# Altium PCB FlightLogger.PcbDoc
Units mm, origin at the board's own origin, x right, y up, seen from the top; angles counter-clockwise.
Board outline 35.6 x 15.7 mm, 2 copper layers (Top Layer, Bottom Layer); 79 components, 46 nets, 225 pads, 47 vias.
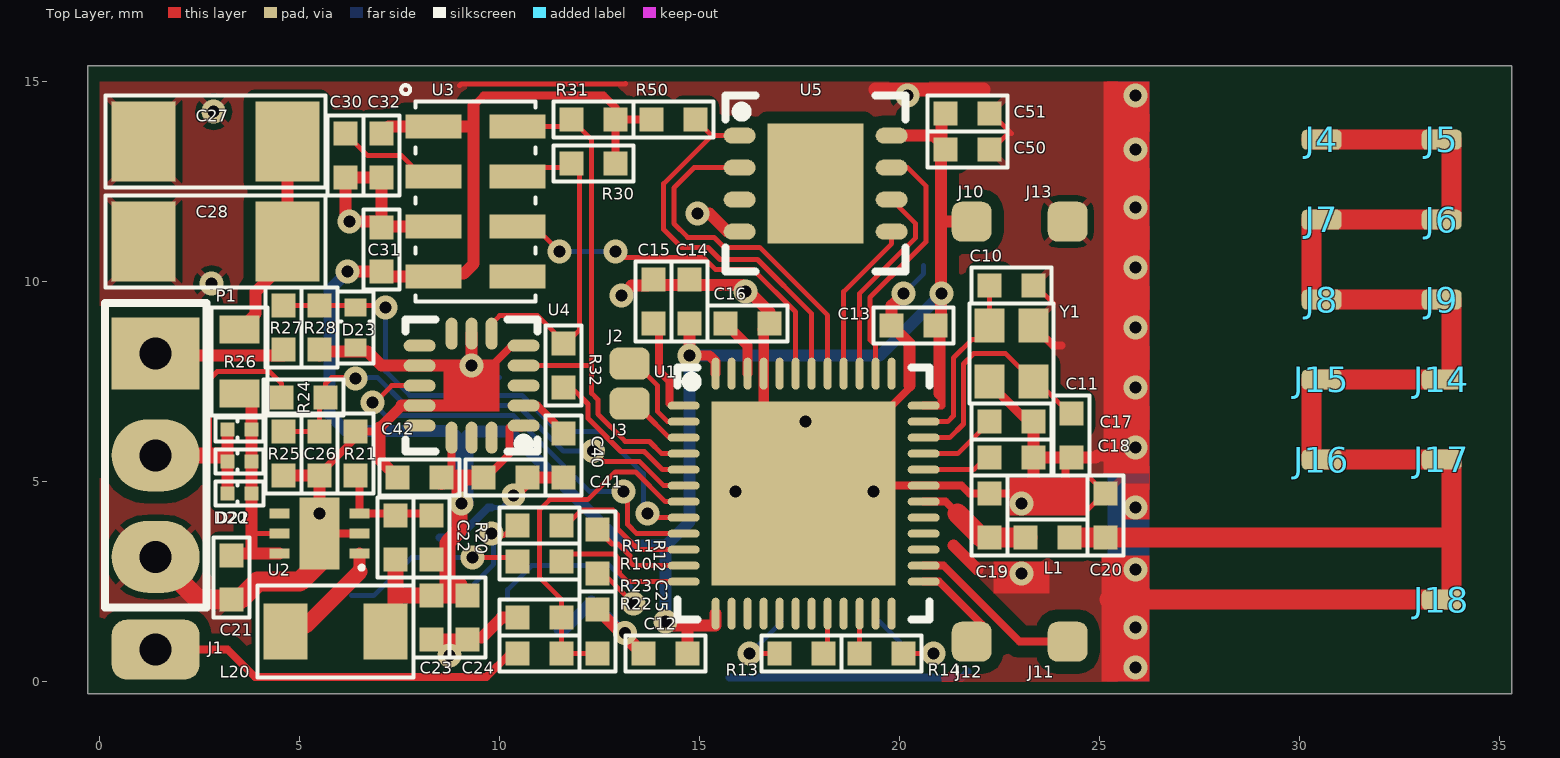
[diagram p0: Top Layer view]
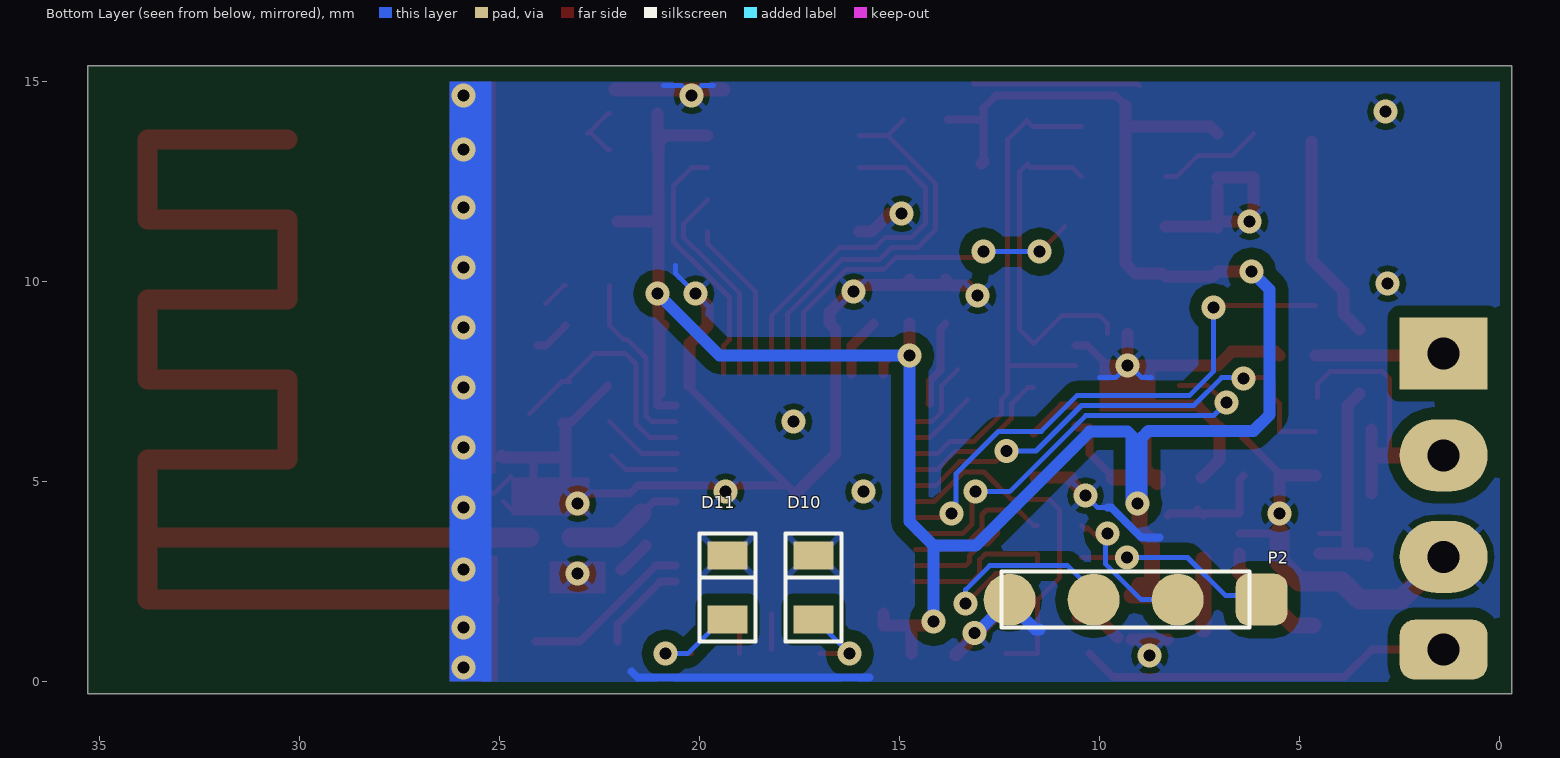
[diagram p1: Bottom Layer view, seen from below]

## Layer stack, top to bottom
Top Solder: solder mask 0.0102, Solder Resist, Dk 3.5
Top Layer: signal copper 0.0356
Dielectric 1: dielectric 0.32, FR-4, Dk 4.8
Bottom Layer: signal copper 0.0356
Bottom Solder: solder mask 0.0102, Solder Resist, Dk 3.5

## Board outline
-0.3,-0.3 35.3,-0.3 35.3,15.4 29.1,15.4 -0.3,15.4

## Design rules (kind name [scope] priority, off if disabled: settings)
Clearance Clearance_pour [InPolygon] p1: gap=0.3 ignorepadtopadclearanceinfootprint=FALSE except(0: Arc-Hole Track-Hole SMDPad-Hole THPad-Hole Via-Hole Fill-Hole Poly-Hole Region-Hole Text-Hole)
Clearance [All] p2: gap=0.127 ignorepadtopadclearanceinfootprint=FALSE except(0: Arc-Hole Track-Hole SMDPad-Hole THPad-Hole Via-Hole Fill-Hole Poly-Hole Region-Hole Text-Hole)
ComponentClearance [All] p1 off: gap=0.1 collisioncheckmode=3 verticalgap=0.1 showdistances=FALSE
FabricationTestpoint [All] p1: side=3 testpointundercomponent=TRUE minsize=1 maxsize=2 preferedsize=1 minholesize=0 maxholesize=1.016 preferedholesize=0 testpointgrid=0.025 allowsidetop=TRUE allowsidebottom=TRUE usegrid=TRUE gridtolerance=0
HoleSize [All] p1: absolutevalues=TRUE maxlimit=2.54 minlimit=0.3 maxpercent=80.000 minpercent=20.000
HoleToHoleClearance [All] p1: gap=0.4 allowstackedmicrovias=TRUE
MinimumAnnularRing [All] p1: minimumring=0.09
MinimumSolderMaskSliver [All] p1: minsoldermaskwidth=0.127
PlaneClearance [All] p1: clearance=0.308
PlaneConnect [All] p1: planeconnectstyle=Relief reliefexpansion=0.2 reliefentries=4 reliefconductorwidth=0.2 reliefairgap=0.2
PolygonConnect PolygonConnect_1 [All vs IsNamedPolygon('Top_GND')] p1: connectstyle=Relief reliefconductorwidth=0.15 reliefentries=4 polygonreliefangle="45 Angle" airgapwidth=0.15
PolygonConnect PolygonConnect_3 [All vs IsNamedPolygon('Bottom_GND')] p2 off: connectstyle=Relief reliefconductorwidth=0.15 reliefentries=4 polygonreliefangle="45 Angle" airgapwidth=0.15
PolygonConnect [All] p3 off: connectstyle=Relief reliefconductorwidth=0.2 reliefentries=4 polygonreliefangle="45 Angle" airgapwidth=0.3
RoomDefinition FlightLogger [InComponentClass('FlightLogger')] p1: confinementstyle=ConfineIn formatcopy=TRUE lockcomponents=FALSE outline 0,0 35,0 35,15 0,15
RoutingCorners [All] p1: cornerstyle=45-Degree minsetback=1.25 maxsetback=1.25
RoutingVias [All] p1: holewidth=0.3 width=0.6 viastyle="Through Hole" minholewidth=0.3 minwidth=0.6 maxholewidth=1 maxwidth=1.5
SilkToSilkClearance [All] p1 off: silktosilkclearance=0.01
SilkToSolderMaskClearance [IsPad] p1: minsilkscreentomaskgap=0 clearancetoexposedcopper=TRUE
SolderMaskExpansion SolderMaskExpansion_vias [IsVia] p1: expansion=-0.6
SolderMaskExpansion [All] p2: expansion=0.01
Width [All] p1: maxlimit=2 minlimit=0.127 preferedwidth=0.127
20 further rules are at their usual default settings.

## Classes and differential pairs
component class FlightLogger: C10 C11 C12 C13 C14 C15 C16 C17 C18 C19 C20 C21 C22 C23 C24 C25 C26 C27 C28 C30 C31 C32 C40 C41 C42 C50 C51 D10 D11 D20 D21 D22 D23 J1 J2 J3 J4 J10 J11 J12 J13 L1 L20 P1 P2 R10 R11 R12 R13 R14 R20 R21 R22 R23 R24 R25 R26 R27 R28 R30 R31 R32 R50 U1 U2 U3 U4 U5 Y1

## Components (designator, comment, footprint, x,y, rotation, side; value= is the part's Value field where it differs from the comment)
C10 "12p" 0402_cap 22.8,9.9 r180 top
C11 "12p" 0402_cap 24.3,6.15 r90 top
C12 "100n" 0402_cap 14.15,0.7 r180 top
C13 "100n" 0402_cap 20.35,8.9 r180 top
C14 "4u7" 0402_cap 14.75,9.5 r90 top
C15 "100n" 0402_cap 13.85,9.5 r90 top
C16 "1u" 0402_cap 16.2,8.95 r0 top
C17 "100p" 0402_cap 22.8,6.5 r180 top
C18 "N/C" 0402_cap 22.8,5.6 r180 top
C19 "0.8p" 0402_cap 22.25,4.15 r270 top
C20 "1.2p" 0402_cap 25.15,4.15 r270 top
C21 "100n" 0402_cap 3.3,2.6 r270 top
C22 "330p" 0402_cap 7.4,3.6 r90 top
C23 "10u" 0402_cap 8.3,1.6 r270 top
C24 "10u" 0402_cap 9.2,1.6 r270 top
C25 "100n" 0402_cap 12.45,1.25 r90 top
C26 "10n" 0402_cap 5.5,5.7 r270 top
C27 "100u" 1206_cap 2.9,13.5 r180 top
C28 "100u" 1206_cap 2.9,11 r180 top
C30 "100n" 0402_cap 6.15,13.15 r90 top
C31 "100n" 0402_cap 7.05,10.8 r270 top
C32 "4u7" 0402_cap 7.05,13.15 r90 top
C40 "100n" 0402_cap 11.6,5.65 r90 top
C41 "100n" 0402_cap 10.15,5.1 r180 top
C42 "4u7" 0402_cap 8,5.1 r0 top
C50 "10u" 0402_cap 21.7,13.3 r180 top
C51 "100n" 0402_cap 21.7,14.2 r180 top
D10 "HCL-1906BR1" 0603_led_green 17.15,2.35 r90 bottom
D11 "HCL-1906BR1" 0603_led_green 19.3,2.35 r90 bottom
D20 "PMEG2002AESF" SOD962_2 3.5,4.7 r180 top
D21 "PMEG2002AESF" SOD962_2 3.5,5.5 r180 top
D22 "PMEG2002AESF" SOD962_2 3.5,6.3 r180 top
D23 "D Zener" VMN2M 6.4,8.85 r90 top
J1 "PAD" PAD_0.6x1mm#1 1.4,0.8 r0 top
J2 "PAD" PAD_0.6x1mm#2 13.25,7.95 r180 top
J3 "PAD" PAD_0.6x1mm#2 13.25,6.95 r180 top
J4 "PAD" PAD_0.6x1mm#3 30.55,13.55 r0 top
J5 "PAD" PAD_0.6x1mm#3 33.55,13.55 r0 top (schematic designator J4)
J6 "PAD" PAD_0.6x1mm#3 33.55,11.55 r0 top (schematic designator J4)
J7 "PAD" PAD_0.6x1mm#3 30.55,11.55 r0 top (schematic designator J4)
J8 "PAD" PAD_0.6x1mm#3 30.55,9.55 r0 top (schematic designator J4)
J9 "PAD" PAD_0.6x1mm#3 33.55,9.55 r0 top (schematic designator J4)
J10 "PAD" PAD_0.6x1mm#4 21.8,11.5 r90 top
J11 "PAD" PAD_0.6x1mm#5 23.5,1 r90 top
J12 "PAD" PAD_0.6x1mm#4 21.8,1 r270 top
J13 "PAD" PAD_0.6x1mm#5 23.5,11.5 r90 top
J14 "PAD" PAD_0.6x1mm#3 33.55,7.55 r0 top (schematic designator J4)
J15 "PAD" PAD_0.6x1mm#3 30.55,7.55 r0 top (schematic designator J4)
J16 "PAD" PAD_0.6x1mm#3 30.55,5.55 r0 top (schematic designator J4)
J17 "PAD" PAD_0.6x1mm#3 33.55,5.55 r0 top (schematic designator J4)
J18 "PAD" PAD_0.6x1mm#3 33.55,2.05 r0 top (schematic designator J4)
L1 "3.9nH" 0402_res 23.7,3.6 r0 top
L20 "CVH252009-2R2M" 1008_Inductor 5.9,1.25 r0 top
P1 "Conn3" HDR1X3 1.4,8.2 r270 top
P2 "Conn4" conn_4pin_1row_1mm 9.35,2.05 r0 bottom
R10 "120" 0402_res 11,3 r0 top
R11 "120" 0402_res 11,3.9 r0 top
R12 "120" 0402_res 12.45,3.25 r90 top
R13 "1k" 0402_res 17.55,0.7 r180 top
R14 "1k" 0402_res 19.55,0.7 r0 top
R20 "100k" 0402_res 8.3,3.6 r90 top
R21 "33k" 0402_res 6.4,5.7 r270 top
R22 "47k" 0402_res 11,0.7 r0 top
R23 "6k8" 0402_res 11,1.6 r180 top
R24 "47k" 0402_res 5.1,7.1 r0 top
R25 "22k" 0402_res 4.6,5.7 r270 top
R26 "2R2" 0603_res 3.5,8 r90 top
R27 "4k7" 0402_res 4.6,8.85 r90 top
R28 "100k" 0402_res 5.5,8.85 r270 top
R30 "4k7" 0402_res 12.35,12.95 r180 top
R31 "4k7" 0402_res 12.35,14.05 r180 top
R32 "0" 0402_res 11.6,7.9 r270 top
R50 "47k" 0402_res 14.35,14.05 r0 top
U1 "nRF52832" QFN48 17.6,4.7 r0 top
U2 "XC9264" USP-6C 5.5,3.7 r180 top
U3 "MPL3115A2" MPL3115A2 9.4,12 r0 top
U4 "MMA8452Q" QFN16SP 9.3,7.4 r180 top
U5 "S25FL064L" USON8 17.9,12.45 r90 top
Y1 "32MHz" Cristal_2_1.6_4pin 22.8,8.2 r270 top

## Footprints (in the part's own frame and the unit in brackets; to place one, negate y for a bottom-side part, rotate by r counter-clockwise, add the part's x,y. Pads: shape width x height; smd on the part's side, far side on the other; paste and mask are expansions set on the pad)
0402_cap [mm]
  rect 0.6x0.6 smd: 1(-0.55,0) 2(0.55,0)
  silkscreen extent -1,-0.45 1,0.45, body extent -0.5,-0.25 0.5,0.25, height 0.5
0402_res [mm]
  rect 0.6x0.6 smd: 1(-0.55,0) 2(0.55,0)
  silkscreen extent -1,-0.45 1,0.45, body extent -0.5,-0.25 0.5,0.25, height 0.25
0603_led_green [mm]
  rect 0.7x1 smd: 1(-0.8,0) 2(0.8,0)
  silkscreen extent -1.35,-0.7 1.35,0.7, body extent -0.8,-0.4 0.8,0.4, height 0.8
0603_res [mm]
  rect 0.7x1 smd: 1(-0.8,0) 2(0.8,0)
  silkscreen extent -1.35,-0.7 1.35,0.7, body extent -0.8,-0.4 0.8,0.4, height 0.45
1008_Inductor [mm]
  rect 1.1x1.4 smd: 1(-1.25,0) 2(1.25,0)
  silkscreen extent -1.95,-1.15 1.95,1.15, body extent -1.25,-1 1.25,1, height 1.6
1206_cap [mm]
  rect 1.6x2 smd: 1(1.8,0) 2(-1.8,0)
  silkscreen extent -2.75,-1.15 2.75,1.15, body extent -1.6,-0.85 1.6,0.85, height 1.6
conn_4pin_1row_1mm [mm]
  rrect50% 1.3x1.3 smd: 1(-3.4,0)
  round 1.3 smd: 2(-1.3,0) 3(0.8,0)
  round 1.3 smd mask+0.01: 4(2.9,0)
  silkscreen extent -3.1,-0.7 3.1,0.7
Cristal_2_1.6_4pin [mm]
  rect 0.85x0.75 smd: 1(-0.7,-0.55) 2(-0.7,0.55) 2(0.7,-0.55) 3(0.7,0.55)
  silkscreen extent -1.25,-1.05 1.25,1.05, body extent -1,-0.8 1,0.8, height 0.5
HDR1X3 [mm] "Connector; Header; 3 Position"
  rect 1.8x2.2 hole 0.8: 1(0,0)
  oval 1.8x2.2 hole 0.8: 2(2.54,0) 3(5.08,0)
  silkscreen extent -1.27,-1.27 6.35,1.27
MPL3115A2 [mm]
  rect 1.4x0.6 smd: 1(-1.05,1.875) 2(-1.05,0.625) 3(-1.05,-0.625) 4(-1.05,-1.875) 5(1.05,-1.875) 6(1.05,-0.625) 7(1.05,0.625) 8(1.05,1.875)
  silkscreen extent -1.86,-2.5 1.5,2.91, body extent -1.5,-2.5 1.5,2.5, height 1.1
PAD_0.6x1mm#1 [mm] "Pad 0.6mmx1mm"
  rrect50% 2.2x1.5 smd: 1(0,0)
PAD_0.6x1mm#2 [mm] "Pad 0.6mmx1mm"
  rrect50% 1x0.8 smd: 1(0,0)
PAD_0.6x1mm#3 [mm] "Pad 0.6mmx1mm"
  rrect50% 1x0.5 smd paste+0 mask-10: 1(0,0)
PAD_0.6x1mm#4 [mm] "Pad 0.6mmx1mm"
  rrect50% 1x1 smd: 1(0,0)
PAD_0.6x1mm#5 [mm] "Pad 0.6mmx1mm"
  rrect50% 1x1 smd: 1(0,-0.7)
QFN16SP [mm] "USON, 8-Leads, Body 3x3mm, Pitch 0.5mm, IPC Low Density"
  oval 0.8x0.3 smd mask+0.03: 1(-1.3,1) 2(-1.3,0.5) 3(-1.3,0) 4(-1.3,-0.5) 5(-1.3,-1) 9(1.3,-1) 10(1.3,-0.5) 11(1.3,0) 12(1.3,0.5) 13(1.3,1)
  oval 0.3x0.8 smd mask+0.03: 6(-0.5,-1.3) 7(0,-1.3) 8(0.5,-1.3) 14(0.5,1.3) 15(0,1.3) 16(-0.5,1.3)
  silkscreen extent -1.65,-1.65 1.65,1.65, body extent -1.5,-1.5 1.5,1.5, height 1
QFN48 [mm] "QFN, 48-Leads, Body 6x6mm, Pitch 0.4mm, IPC Low Density"
  oval 0.8x0.2 smd mask+0.03: 1(-3,2.2) 2(-3,1.8) 3(-3,1.4) 4(-3,1) 5(-3,0.6) 6(-3,0.2) 7(-3,-0.2) 8(-3,-0.6) 9(-3,-1) 10(-3,-1.4) 11(-3,-1.8) 12(-3,-2.2) 25(3,-2.2) 26(3,-1.8) 27(3,-1.4) 28(3,-1) 29(3,-0.6) 30(3,-0.2) 31(3,0.2) 32(3,0.6) 33(3,1) 34(3,1.4) 35(3,1.8) 36(3,2.2)
  oval 0.2x0.8 smd mask+0.03: 13(-2.2,-3) 14(-1.8,-3) 15(-1.4,-3) 16(-1,-3) 17(-0.6,-3) 18(-0.2,-3) 19(0.2,-3) 20(0.6,-3) 21(1,-3) 22(1.4,-3) 23(1.8,-3) 24(2.2,-3) 37(2.2,3) 38(1.8,3) 39(1.4,3) 40(1,3) 41(0.6,3) 42(0.2,3) 43(-0.2,3) 44(-0.6,3) 45(-1,3) 46(-1.4,3) 47(-1.8,3) 48(-2.2,3)
  rect 4.6x4.6 smd mask+0.07: 49(0,0)
  silkscreen extent -3.15,-3.15 3.15,3.15, body extent -3,-3 3,3, height 0.9
SOD962_2 [mm]
  rect 0.35x0.35 smd mask+0.03: 1(-0.3,0) 2(0.3,0)
  silkscreen extent -0.6,-0.3 0.6,0.3, body extent -0.3,-0.15 0.3,0.15, height 0.35
USON8 [mm] "USON, 8-Leads, Body 4x4mm, Pitch 0.8mm, IPC Low Density"
  oval 0.4x0.8 smd mask+0.05: 1(1.2,1.9) 2(0.4,1.9) 3(-0.4,1.9) 4(-1.2,1.9) 5(-1.2,-1.9) 6(-0.4,-1.9) 7(0.4,-1.9) 8(1.2,-1.9)
  rect 3x2.4 smd mask+0.07: 9(0,0)
  silkscreen extent -2.2,-2.25 2.2,2.25, body extent -2,-2 2,2, height 0.6
USP-6C [mm] "USP-6C"
  rect 0.5x0.25 smd mask+0.03: 1(-1,0.5) 2(-1,0) 3(-1,-0.5) 4(1,-0.5) 5(1,0) 6(1,0.5)
  rect 1x1.8 smd mask+0.03: 7(0,0)
  silkscreen extent -1.1,0.8 -1,0.9, body extent -1,-0.9 1,0.9, height 0.6
VMN2M [mm]
  rect 0.45x0.55 smd: 1(-0.5,0) 2(0.5,0)
  silkscreen extent -0.9,-0.45 0.9,0.45, body extent -0.4,-0.3 0.4,0.3, height 0.45

## Part data
C10 C11 C12 C13 C14 C15 C16 C17 C18 C19 C20 C21 C22 C23 C24 C25 C26 C27 C28 C30 C31 C32 C40 C41 C42 C50 C51: library part CAP, "Capacitor"
D10 D11: library part LED, "Typical RED, GREEN, YELLOW, AMBER GaAs LED"
D20 D21 D22: library part 1PS76SB10, "Schottky Barrier Diode"
D23: "Zener Diode"
J1 J2 J3 J4 J5 J6 J7 J8 J9 J10 J11 J12 J13 J14 J15 J16 J17 J18: "Pad"
L1 L20: library part Inductor, "Inductor"
P1: library part conn_3pin_1, "3pin connection"
P2: library part conn_4pin, "4pin connection"
R10 R11 R12 R13 R14 R20 R21 R22 R23 R24 R25 R26 R27 R28 R30 R31 R32 R50: library part RES, "Resistor"
U1: "ARM Cortex M4  microcontroller with 2.4GHz radio"
U2: "18V 0.5A step down DC-DC converter"
U3: "Precision barometer sensor I2C"
U4: "3 axis accelerometer"
U5: "64Mbit NOR flash"
Y1: library part XTAL, "Crystal Oscillator"

## Free pads (board coordinates)
  rrect50% 2.2x1.5 hole 0.8: 0(1.4,0.8)

## Via types
v1: diameter 0.6, hole 0.3, Top Layer to Bottom Layer, 47 vias

## Nets (pads, with @x,y where several pads share a name; then routed paths per layer and width w, separated by ;. In a path a pad name is that pad's centre, name@x,y a point inside that pad or via, vN(x,y) a via of type N, cw(c..) or ccw(c..) an arc to the next point about the centre after c; other vN are vias at no path point)
ACC_INT: U1.9 U4.11 | length 10.8
  Top Layer w0.127: v1@6.825,6.925 7.3,7.4 U4.11 ; v1@13.2,4.65 13.194,4.645 13.194,3.933 13.428,3.7 U1.9
  Bottom Layer w0.127: v1(6.825,6.977) 7.152,6.65 10.35,6.65 12.25,4.75 v1(13.1,4.75)
ANA_EXT: C25.1 R22.2 R23.1 U1.7 | length 8.9
  Top Layer w0.127: C25.1@12.35,0.7 R22.2 R23.1 11.55,2.05 11,2.6 11,4.3 11.25,4.55 12.2,4.55 12.89,5.24 13.4,5.24 14.141,4.5 U1.7
ANA_INT: C26.1 R24.2 R25.1 U1.6 | length 12.3
  Top Layer w0.127: R25.1 C26.1 5.5,6.95 R24.2 5.65,7.45 5.8,7.6 6.38,7.6 v1(6.4,7.58) ; v1@12.35,5.75 12.6,5.5 13.5,5.5 14.1,4.9 U1.6
  Bottom Layer w0.127: v1@6.4,7.6 6.95,7.6 7.646,6.904 10.455,6.904 11.591,5.768 v1(12.327,5.768)
FLS_CK: U1.39 U5.6 | length 5.2
  Top Layer w0.127: U1.39 19,9.709 20.15,10.86 20.162,10.86 20.4,11.098 20.4,11.45 U5.6
FLS_CS: R50.2 U1.42 U5.1 | length 10.2
  Top Layer w0.127: R50.2 15.3,13.65 ; U5.1 15.3,13.65 ; U1.42 17.8,9.2 16.446,10.554 15.505,10.554 15.205,10.854 14.55,10.854 14.1,11.304 14.1,12.45 15.3,13.65
FLS_RESET: U1.38 U5.7 | length 6.4
  Top Layer w0.127: U1.38 19.4,8.4 19.254,8.546 19.254,9.604 20.256,10.606 20.267,10.606 20.654,10.993 20.654,12.396 20.2,12.85 U5.7
FLS_SI: U1.40 U5.5 | length 4
  Top Layer w0.127: U1.40 18.6,9.75 19.8,10.95 U5.5
FLS_SO: U1.41 U5.2 | length 9
  Top Layer w0.127: U5.2 14.859,12.85 14.354,12.345 14.354,11.454 14.7,11.108 15.36,11.108 15.609,10.86 16.5,10.86 18.2,9.159 U1.41
GND: C10.1 C11.1 C12.2 C13.2 C14.2 C15.2 C16.2 C17.1 C18.1 C19.1 C20.1 C21.2 C23.2 C24.2 C25.2 C26.2 C27.1 C28.1 C30.1 C31.1 C32.1 C40.1 C41.1 C42.1 C50.1 C51.1 D10.2 D11.2 D23.1 J13.1 P1.3 P2.4 R21.1 R23.2 R25.2 R28.2 U1.31 U1.45 U1.49 U2.2 U2.7 U3.3 U4.5 U4.7 U4.10 U4.12 U5.4 Y1.2 | length 97.7
  Top Layer w0.127: 9,14.9 9.041,14.941 13.14,14.941 13.15,14.95 ; C50.1 22.3,13.3 22.75,13.75 ; C51.1 22.3,14.2 22.75,13.75 ; 22.8,13.7 22.75,13.75 ; C10.1 23.4,9.9 23.85,9.45 ; 24.5,4.9 24.725,5.125 C20.1 C20.1@25.2,4.7 ; 24.6,4.3 24.7,4.3 C20.1@24.9,4.5
  Top Layer w0.2: U2.7 U2.2 ; C26.2 5.5,5.2 6.4,6.1 R21.1 7,6.25 ; v1@9.25,7.9 v1(9.3,7.9) 9.8,7.9 10.3,8.4 U4.5 ; U1.49 U1.49@17.8,4.9 ; 20.25,7.4 20.25,7.35 U1.49@17.8,4.9 ; Y1.2@23.35,8.9 23.85,8.4 24.05,8.4 ; C11.1@24.15,5.6 24.15,5.05 23.8,4.7 22.55,4.7 21.75,4.7 21.55,4.9 U1.31 U1.49@17.8,4.9 ; 24.9,5.6 25.15,5.6 25.25,5.7
  Top Layer w0.22: Y1.2@22.3,7.4 23.2,6.5 C17.1
  Top Layer w0.27: 7,6.35 7.55,6.9 ; U1.49@16.6,5.7 U1.45 C16.2@16.6,8.8
  Top Layer w0.3: R25.2 C26.2 U2.7 ; R28.2@5.5,8.15 5.6,8.25 6.7,8.25 7.05,7.9 U4.10 v1@9.25,7.9 ; v1@6.15,11.65 C30.1 C32.1 ; v1(6.25,11.5) C31.1@7,11.5 ; 7,6.35 7,6.25 7,5.55 C42.1 ; C31.1 C31.1@7.05,11.4 ; C32.1@7.05,12.35 C31.1@7.05,11.4 ; 7.55,6.9 U4.12 9.3,6.9 v1(9.3,7.9) U4.7 ; C23.2 C24.2 ; U3.3 7.075,11.375 C31.1@7.05,11.4 ; 9.55,1.1 10.05,1.6 R23.2@10.55,1.6 ; v1@10.3,4.6 v1@10.301,4.601 ; v1(10.35,4.65) v1@10.301,4.601 ; C40.1 C41.1 10.7,5 v1@10.301,4.601 ; C25.2 C12.2@13.6,0.65 ; v1(13.05,9.65) 13.3,9.9 13.7,9.9 C15.2 13.85,9.92 C14.2@14.88,9.92 ; v1(13.131,1.223) 13.131,1.169 C12.2 ; C14.2 C14.2@14.88,9.92 ; v1(14.95,11.7) 15.25,11.7 15.7,11.25 U5.4 ; v1(16.15,9.75) v1@16.15,9.84 ; U1.49@16.6,5.7 U1.49 ; C16.2@16.6,8.8 C16.2 16.75,9.24 v1@16.15,9.84 ; v1(20.1,9.7) 19.8,9.4 C13.2 20.25,8.45 20.25,7.4 ; 21.35,3.4 21.95,2.8 ; C18.1 23.35,5.05 23.4,5 ; C17.1@23.4,6.45 23.35,6.4 23.35,5.65 23.4,5.6 24.15,5.6 24.9,5.6 24.95,5.65 ; C14.2@14.88,9.92 16.07,9.92 v1@16.15,9.84
  Top Layer w0.35: 19.4,14.8 20.723,14.8 20.725,14.802 22.098,14.802 22.1,14.8
  Top Layer w0.5: P1.3 2.47,2.05 C21.2 3.5,2.05 3.95,2.5 5,2.5 5.5,3 U2.7 ; 25.25,2.05 33.8,2.05
  Bottom Layer w0.127: 8.7,7.6 8.95,7.6 9.25,7.9 v1(9.3,7.9) 9.6,7.6 10,7.6 ; 9.8,4.35 10.05,4.35 v1(10.35,4.65) ; 19.65,14.9 19.95,14.9 v1(20.2,14.65) 20.45,14.9 20.9,14.9 ; v1(20.1,9.7) 20.6,10.2 20.6,10.4
  Bottom Layer w0.2: 8.5,3.6 8.955,3.6 9.705,4.35 9.8,4.35 ; 15.75,0.1 21.55,0.1 21.7,0.25
  Bottom Layer w0.3: 11.5,1.3 11.6,1.3 12.3,2 13.077,1.223 v1(13.131,1.223)
  other v1: 25.9,0.35 8.75,0.65 25.9,1.35 23.05,2.7 25.9,2.8 5.5,4.2 25.9,4.35 23.05,4.45 15.9,4.75 19.35,4.75 25.9,5.85 17.65,6.5 25.9,7.35 25.9,8.85 2.8,9.95 25.9,10.35 25.9,11.85 25.9,13.3 2.85,14.25 25.9,14.65
IF_CTRL: R10.2 U1.12 | length 3.8
  Top Layer w0.127: R10.2 11.55,3.191 12.859,3.191 13,3.05 13,2.7 13.2,2.5 U1.12 U1.12@14.65,2.5
IF_RX_IN: R12.2 U1.11 | length 2.6
  Top Layer w0.127: R12.2@12.55,3.85 12.55,3.7 12.805,3.445 12.965,3.445 13.254,3.155 13.254,2.996 13.35,2.9 U1.11
IF_TX_OUT: R11.2 U1.10 | length 3.8
  Top Layer w0.127: R11.2 11.65,3.9 12,4.25 12.031,4.25 12.071,4.29 12.829,4.29 12.94,4.179 12.94,3.828 13.468,3.3 U1.10
LED_BLE: R14.1 U1.22 | length 1
  Top Layer w0.127: R14.1 U1.22
LED_ON: R13.1 U1.20 | length 0.9
  Top Layer w0.127: R13.1@18.2,0.8 U1.20
NetC10_2: C10.2 U1.35 Y1.1 | length 4.5
  Top Layer w0.127: U1.35 21.2,6.5 21.341,6.64 21.341,8.09 21.8,8.55 21.9,8.55 Y1.1 C10.2
NetC11_2: C11.2 U1.34 Y1.3 | length 6.1
  Top Layer w0.127: U1.34 21.25,6.1 21.595,6.445 21.595,7.945 21.85,8.2 22.65,8.2 Y1.3 ; Y1.3@23.25,7.5 Y1.3 ; C11.2@24.25,6.7 23.45,7.5 Y1.3
NetC15_1: C15.1 U1.1 | length 2.2
  Top Layer w0.2: C15.1 13.977,8.823 13.977,7.784 14.24,7.52 14.24,6.959 U1.1@14.25,6.95
NetC16_1: C16.1 U1.46 | length 1.5
  Top Layer w0.25: C16.1 16.2,8.4 U1.46
NetC17_2: C17.2 U1.33 | length 2
  Top Layer w0.127: U1.33@20.55,5.7 U1.33 21.45,5.7 C17.2
NetC18_2: C18.2 U1.32 | length 1.7
  Top Layer w0.127: U1.32 21.85,5.3 C18.2@22.2,5.65
NetC19_2: C19.2 L1.1 U1.30 | length 3
  Top Layer w0.2: U1.30 21.15,4.5 21.45,4.2
  Top Layer w0.5: 21.45,4.2 22.05,3.6 C19.2 L1.1 L1.1@23.2,3.6
NetC20_2: C20.2 J4.1 J5.1 J6.1 J7.1 J8.1 J9.1 J14.1 J15.1 J16.1 J17.1 J18.1 L1.2 | length 38.6
  Top Layer w0.5: L1.2 C20.2 33.8,3.6 ; J4.1@30.3,13.55 33.8,13.55 33.8,11.55 30.3,11.55 30.3,9.55 33.8,9.55 33.8,7.55 30.3,7.55 30.3,5.55 33.8,5.55 33.8,3.6 ; J18.1@33.8,2.05 33.8,3.6
NetC21_1: C21.1 D20.1 D21.1 D22.1 R26.1 U2.5 U2.6 | length 6
  Top Layer w0.127: 3.8,3.7 U2.5
  Top Layer w0.3: C21.1 3.35,3.2 3.8,3.2 ; R26.1 3.8,6.9 D22.1 D21.1 D20.1 3.8,3.7 3.8,3.2 ; U2.6 3.8,3.2
NetC22_2: C22.2 R20.2 R21.2 U2.3 | length 3
  Top Layer w0.2: R21.2 6.5,5.05 U2.3 C22.2@7.45,4.2 ; C22.2 C22.2@7.45,4.2 ; C22.2@7.55,4.3 C22.2@7.45,4.2 ; R20.2 8.25,4.2 C22.2@7.45,4.2
NetC27_2: C27.2 C28.2 R26.2 | length 5.2
  Top Layer w0.3: R26.2 3.9,9.2 3.9,9.75 4.7,10.55 C28.2 C27.2
NetC30_2: C30.2 U3.2 | length 2.6
  Top Layer w0.127: C30.2 6.7,13.15 7.55,13.15 8.075,12.625 U3.2
NetC40_2: C40.2 U4.2 | length 1.3
  Top Layer w0.2: U4.2 10.95,6.9 C40.2@11.65,6.2
NetD10_1: D10.1 R13.2 | length 1.9
  Top Layer w0.127: v1@16.3,0.65 16.35,0.7 R13.2
  Bottom Layer w0.127: v1(16.25,0.7) D10.1@17.05,1.5
NetD11_1: D11.1 R14.2 | length 2.4
  Top Layer w0.127: R14.2@20.2,0.7 v1(20.85,0.7)
  Bottom Layer w0.127: D11.1@19.45,1.55 20.3,0.7 v1(20.85,0.7)
NetD20_2: D20.2 D21.2 D22.2 P1.2 R24.1 | length 7.5
  Top Layer w0.127: 2.75,5.66 2.75,7.57 2.93,7.75 4.25,7.75 4.55,7.45 R24.1
  Top Layer w0.3: D20.2 D21.2 D22.2
  Top Layer w0.4: P1.2 2.75,5.66 3.01,5.66
NetJ1_1: J1.1 pad.0 R22.1 | length 9.4
  Top Layer w0.2: J1.1 3.2,0.8 3.877,0.123 9.673,0.123 R22.1@10.25,0.7
NetJ2_1: J2.1 U1.2 | length 2
  Top Layer w0.127: J2.1@13.55,7.8 13.95,7.4 13.95,6.75 14.2,6.5 U1.2
NetJ3_1: J3.1 U1.3 | length 1.7
  Top Layer w0.127: J3.1@13.3,7.05 13.596,6.754 13.596,6.745 14.241,6.1 U1.3
NetJ11_1: J11.1 U1.26 | length 4.3
  Top Layer w0.2: U1.26 21.1,2.9 23,1 24,1 J11.1@24.1,1
NetJ12_1: J12.1 U1.25 | length 2.3
  Top Layer w0.2: U1.25 20.988,2.5 22.05,1.438 J12.1@22.05,1
NetL20_1: L20.1 U2.1 | length 2.9
  Top Layer w0.3: 6.5,2.75 U2.1
  Top Layer w0.4: L20.1@4.65,1.4 5.15,1.4 6.5,2.75
NetP1_1: P1.1 R27.1 | length 3.2
  Top Layer w0.3: P1.1 1.45,8.15 R27.1@4.6,8.15
NetP2_1: P2.1 R10.1 | length 4.5
  Top Layer w0.127: v1(9.32,3.102) 10.448,3.102 R10.1@10.45,3.1
  Bottom Layer w0.127: P2.1@6.3,2.15 6.85,2.15 7.802,3.102 v1(9.32,3.102)
NetP2_2: P2.2 R11.1 | length 4
  Top Layer w0.127: v1(9.8,3.7) 10.05,3.7 10.1,3.65 10.3,3.85 10.35,3.8 R11.1
  Bottom Layer w0.127: P2.2 8.961,2.05 9.85,2.939 v1@9.85,3.9
  Bottom Layer w0.3: v1@9.726,3.724 v1@9.726,3.776
NetP2_3: P2.3 R12.1 | length 5.4
  Top Layer w0.127: R12.1 12.6,2.7 v1@13.3,2
  Bottom Layer w0.127: P2.3@10.2,2.05 10.2,2.3 10.8,2.9 12.75,2.9 13.35,2.3 v1(13.35,1.95)
NetR30_2: R30.2 R32.1 U3.7 U4.6 | length 8.6
  Top Layer w0.127: U4.6 9.8,8.95 10,9.15 10.95,9.15 11.65,8.45 12,8.8 12,12.75 11.825,12.925 R30.2 ; U3.7 10.675,12.85 R30.2@11.75,12.85
PPM: D23.2 R27.2 R28.1 U1.8 | length 13.4
  Top Layer w0.127: R27.2 R28.1 7.1,9.4 v1(7.15,9.35) ; v1@13.847,4.1 U1.8
  Bottom Layer w0.127: v1(7.15,9.35) 7.15,7.759 7.751,7.158 10.56,7.158 11.46,6.258 12.53,6.258 13.59,5.198 13.59,4.36 v1@13.7,4.25
  other v1: 13.7,4.2
PRESS_INT: U1.43 U3.6 | length 8.9
  Top Layer w0.127: U3.6@10.875,11.375 v1(11.5,10.75) ; v1(12.9,10.75) 13.05,10.6 15.1,10.6 15.4,10.3 16.341,10.3 17.4,9.241 U1.43
  Bottom Layer w0.127: v1(11.5,10.75) v1(12.9,10.75)
PRESS_SC: R31.2 U1.4 U3.8 U4.4 | length 13.3
  Top Layer w0.127: U3.8 11.675,13.875 R31.2@11.8,14 ; U4.4 12.3,7.9 ; R31.2@11.825,14.025 12.3,13.55 12.3,7.9 ; U1.4 14.05,5.7 13.748,6.002 13.716,6.002 13.71,6.008 13.14,6.008 12.459,6.688 12.459,7.05 12.3,7.209 12.3,7.9
PRESS_SD: R32.2 U1.5 | length 4
  Top Layer w0.127: R32.2@11.65,7.35 11.8,7.35 12.205,6.945 12.205,6.583 13.035,5.754 13.605,5.754 13.611,5.748 13.62,5.748 14.069,5.3 U1.5
VCC: C12.1 C13.1 C14.1 C22.1 C23.1 C24.1 C31.2 C32.2 C41.2 C42.2 C50.2 C51.2 J10.1 L20.2 R20.1 R30.1 R31.1 R50.1 U1.13 U1.36 U1.48 U3.1 U3.4 U4.1 U4.14 U5.8 | length 73.7
  Top Layer w0.2: C42.2@8.55,4.997 C42.2 8.8,5.35 U4.14 ; 9.35,14.4 9.6,14.65 12.6,14.65 12.9,14.35 R31.1 ; C41.2@9.65,5.1 10.25,5.7 10.25,6.35 10.55,6.35 U4.1 ; R30.1@12.9,13 R31.1 ; R50.1 R31.1 ; U1.36 21.05,6.9 21.05,7.15 21,7.2
  Top Layer w0.25: v1(14.75,8.15) 15.25,8.15 15.4,8 U1.48
  Top Layer w0.3: v1(6.2,10.25) C31.2 7.175,10.125 U3.4 8.425,10.2 9.1,10.2 9.35,10.45 9.35,13.95 ; C32.2 7.225,13.875 U3.1 9.275,13.875 9.35,13.95 ; 9.35,14.4 9.35,13.95 ; R30.1@12.9,13 R30.1@12.95,12.95 ; v1(14.15,1.5) 14.25,1.4 14.7,1.4 ; C12.1 14.7,1.4 ; v1(14.75,8.15) C14.1 ; U1.13 15.4,1.4 14.7,1.4 ; U5.8 20.85,13.65 21.03,13.47 21.03,11.5 ; 21,7.2 21,8.8 C13.1 21.03,8.9 21.03,11.5 ; C50.2@21.05,13.3 C51.2@21.05,14.2 ; J10.1@22.05,11.5 21.03,11.5
  Top Layer w0.4: L20.2@7.4,1.3 7.4,2.15 ; C22.1 7.4,2.15 ; C23.1 7.4,2.15 ; C42.2@8.55,4.997 C42.2 9,5.1 ; 8.7,2.423 9,2.423 9,2.35 C24.1 8.7,2.15 ; 8.7,3.45 8.7,3.369 8.693,3.369 8.693,2.157 8.7,2.15 ; 8.735,3.523 8.927,3.715 8.927,3.727 9,3.8 9,5.1 ; C41.2@9.65,5.1 C41.2 9,5.1 ; 7.4,2.15 8.7,2.15
  Bottom Layer w0.3: v1(6.2,10.25) 5.75,9.8 5.75,6.676 6.155,6.271 8.779,6.271 8.95,6.1 8.95,4.4 9.05,4.3 9.2,4.45 9.2,6.15 9.3,6.25 10.25,6.25 13.1,3.4 14.15,3.4 ; v1(14.15,1.5) 14.15,3.4 ; v1(21.05,9.7) 19.5,8.15 v1(14.75,8.15) 14.75,4 14.15,3.4
  other v1: 9.05,4.45
pads on no net: U1.14 U1.15 U1.16 U1.17 U1.18 U1.19 U1.21 U1.23 U1.24 U1.27 U1.28 U1.29 U1.37 U1.44 U1.47 U2.4 U3.5 U4.3 U4.8 U4.9 U4.13 U4.15 U4.16 U5.3 U5.9

## Polygon pours and split planes (outlines as drawn)
GND on Bottom Layer "Top_GND" (solid, remove dead copper, pour order 4): 0,15 0,0 26.25,0 26.25,15
GND on Top Layer "Top_GND" (solid, remove dead copper, pour order 2): 0,15 0,0 26.25,0 26.25,15

## Other copper
Top Layer:
  rectangle net GND: 25.1,5.2 26.25,15
  rectangle net GND: 25.6,4.05 26.25,4.95
  rectangle net GND: 25.05,0 26.25,3.15
  rectangle net GND: 22.35,2.2 23.75,3
  rectangle net GND: 22.75,4.15 24.7,5.1
  rectangle net GND: 8.6,6.75 10,8.05
Bottom Layer:
  rectangle net GND: 25.2,0 26.25,15

## Silkscreen, mask and mechanical layers (free items; w line width, h text height)
Mechanical 2:
  drawing of 201 lines, arcs and shapes, not listed
Mechanical 3:
  lines w0.16: 12.7,1.1 13.15,1.1 13.15,3 4.95,3 4.95,1.1 13.2,1.1 ; 16.45,2.6 17.85,2.6 ; 18.6,2.6 20,2.6 ; 16.45,1 16.45,3.7 17.85,3.7 17.85,1 16.45,1 ; 18.6,1 20,1 20,3.7 18.6,3.7 18.6,1
Mechanical 4:
  lines w0.254: -0.3,-0.3 -0.3,15.3 35.3,15.3 35.3,-0.3 -0.3,-0.3
Mechanical 15:
  lines w0.1: 26.25,2.5 26.25,3 ; 26.25,3.3 33.55,3.3 33.55,2.3 26.25,2.3 26.25,1.8 34.05,1.8 34.05,5.8 30.55,5.8 30.55,7.3 34.05,7.3 34.05,9.8 30.55,9.8 30.55,11.3 34.05,11.3 34.05,13.8 30.05,13.8 30.05,13.3 33.5,13.3 ; 34.05,2.45 34.05,2.95